# Altium PCB BLErelay.PcbDoc
Units mm, origin at the board's own origin, x right, y up, seen from the top; angles counter-clockwise.
Board outline 21 x 43.51 mm, 2 copper layers (Top Layer, Bottom Layer), stack 1.569 mm thick; 48 components, 59 nets, 167 pads, 64 vias.
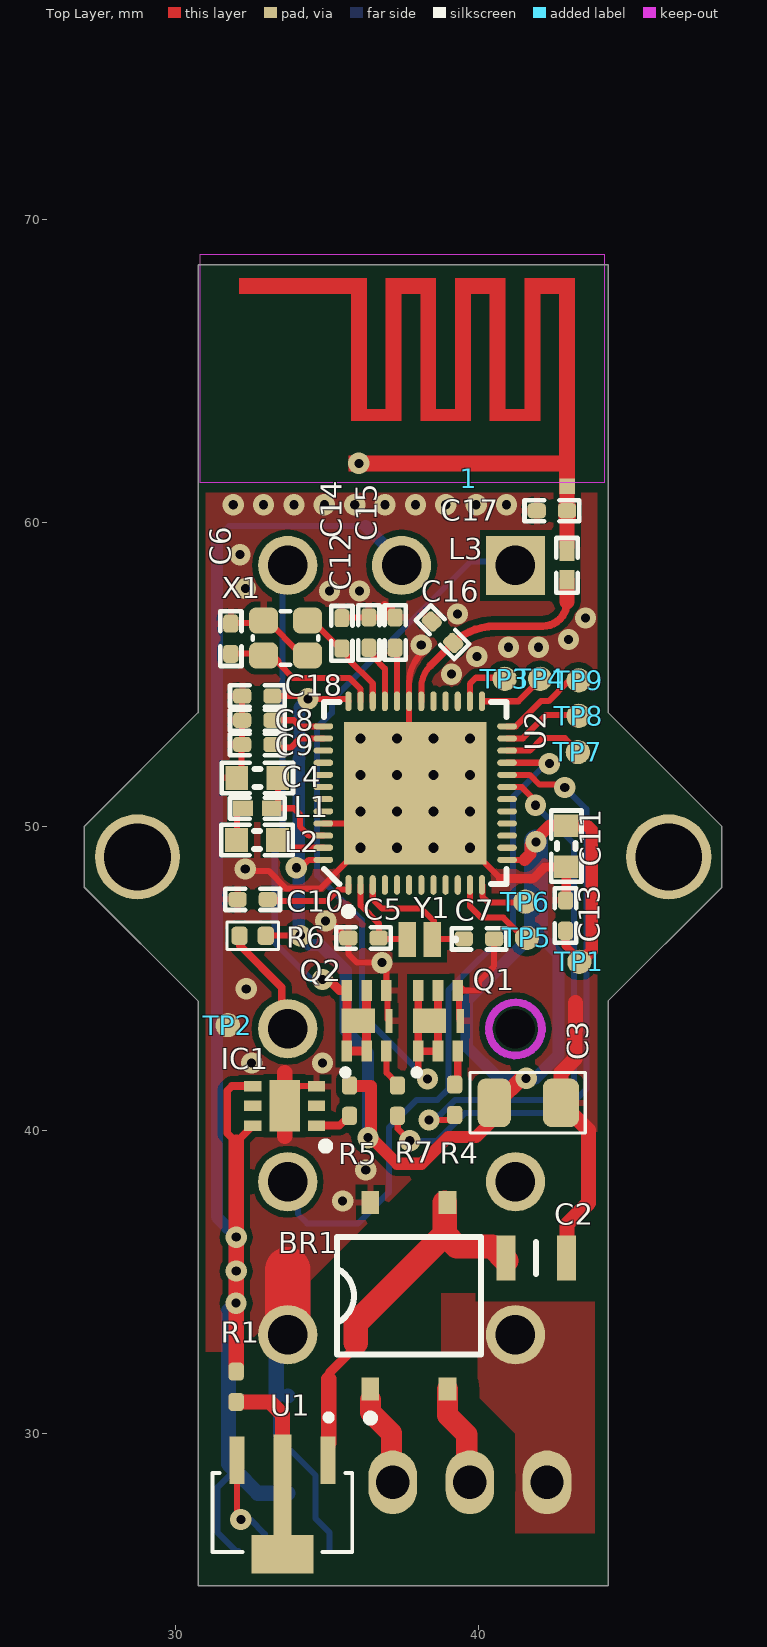
[diagram p0: Top Layer view]
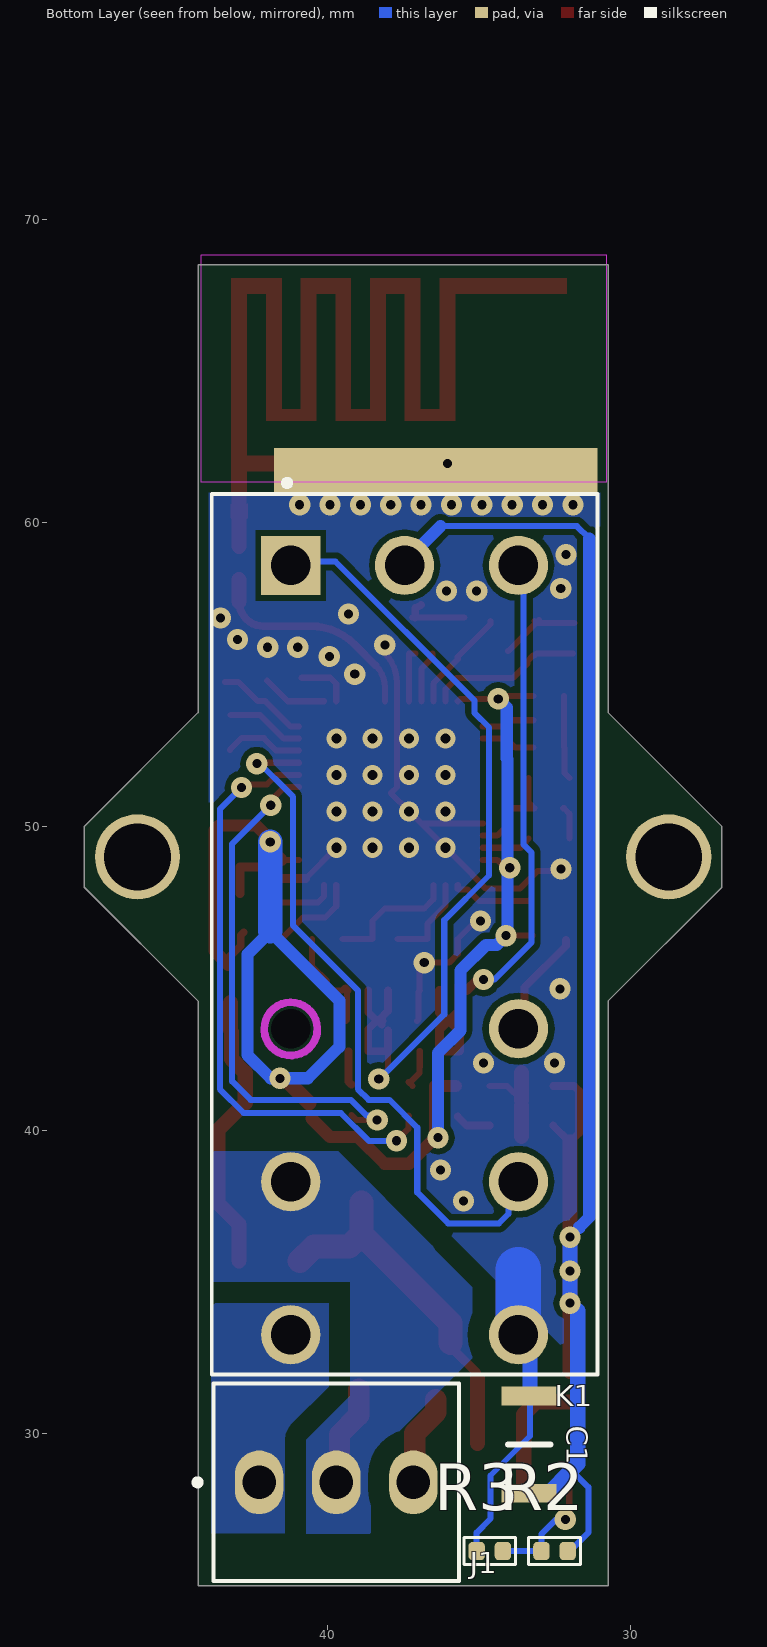
[diagram p1: Bottom Layer view, seen from below]
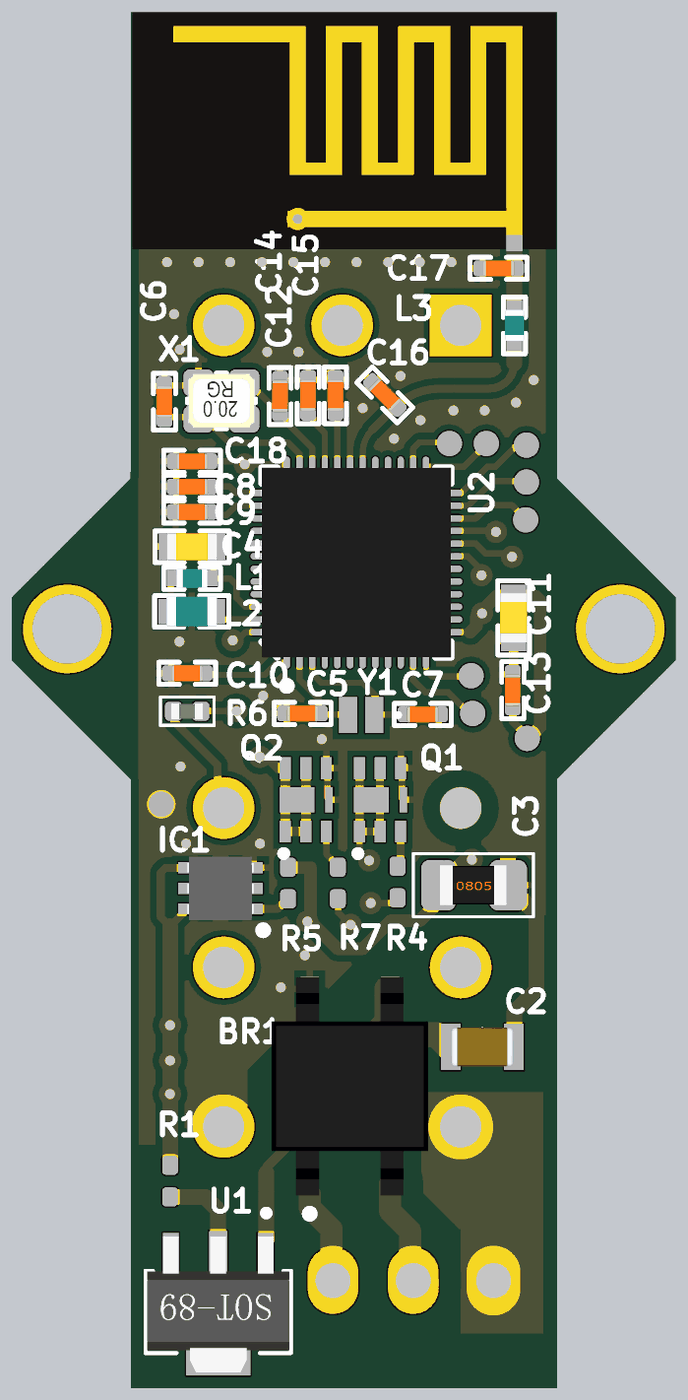
[diagram p2: 3D render of the assembled board from above, using the file's embedded part models]
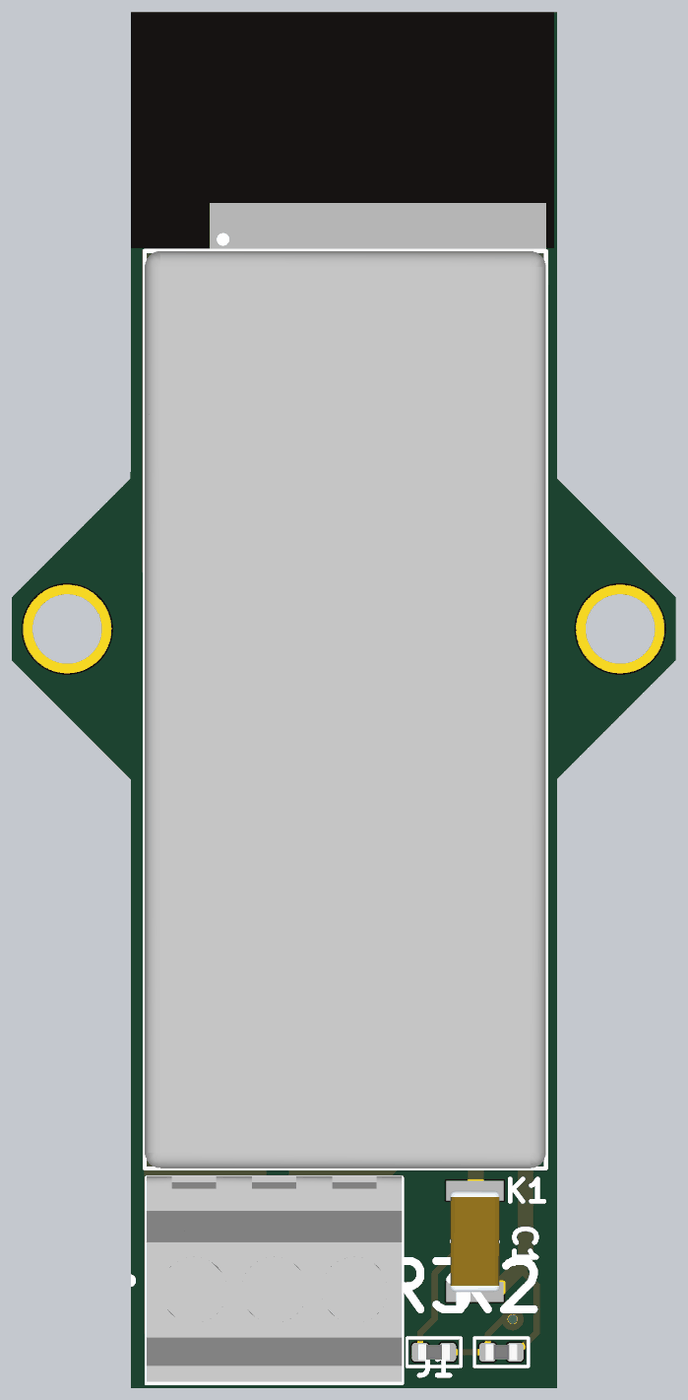
[diagram p3: 3D render of the assembled board from below, using the file's embedded part models]

## Layer stack, top to bottom
Top Solder: solder mask 0.0254, SM-001, Dk 4
Top Layer: signal copper 0.035
Dielectric 1: core 1.4986, Core-043, Dk 4.3
Bottom Layer: signal copper 0.035
Bottom Solder: solder mask 0.0254, SM-001, Dk 4

## Board outline
27,48 27,50 30.75,53.75 30.75,68.5 44.25,68.5 44.25,53.75 48,50 48,48 44.25,44.25 44.25,24.995 30.75,24.995 30.75,44.25

## Design rules (kind name [scope] priority, off if disabled: settings)
BoardOutlineClearance [All] p1: gap=0.254 ignorepadtopadclearanceinfootprint=FALSE
Clearance Clearance_power [InNetClass('High voltage')] p1: gap=0.7 ignorepadtopadclearanceinfootprint=FALSE
Clearance Clearance_not_via [not IsVia and (not InComponent('U2')) vs not IsVia] p2: gap=0.2 ignorepadtopadclearanceinfootprint=TRUE except(0.202: Arc-Fill Arc-Poly Arc-Region Track-Fill Track-Poly Track-Region SMDPad-Fill SMDPad-Poly SMDPad-Region THPad-Fill THPad-Poly THPad-Region Via-Fill Via-Poly Via-Region)
Clearance Clearance_via [IsVia] p3: gap=0.202 ignorepadtopadclearanceinfootprint=FALSE
Clearance Clearance_same_net [(not InComponent('1')) and (not InComponent('U2'))] p4: gap=0.202 ignorepadtopadclearanceinfootprint=TRUE
Clearance Clearance_pad_pad [IsPad and (not InComponent('U2')) vs IsPad] p5: gap=0.2 ignorepadtopadclearanceinfootprint=FALSE
ComponentClearance [All] p1: gap=0.1 collisioncheckmode=3 verticalgap=0.254 showdistances=FALSE
DiffPairsRouting [All] p1: maxlimit=0.254 minlimit=0.102 mostfreqgap=0.203 toplayer_minwidth=0.102 toplayer_maxwidth=2.54 toplayer_prefwidth=0.152 bottomlayer_minwidth=0.102 bottomlayer_maxwidth=2.54 bottomlayer_prefwidth=0.152 maxuncoupledlength=12.7
HoleSize [All] p1: absolutevalues=TRUE maxlimit=5.08 minlimit=0.3 maxpercent=80.000 minpercent=20.000
Length [All] p1: maxlimit=700 minlimit=0
MinimumSolderMaskSliver [All] p1: minsoldermaskwidth=0.151
PlaneClearance [All] p1: clearance=0.2
PlaneConnect [All] p1: planeconnectstyle=Relief reliefexpansion=0.2 reliefentries=4 reliefconductorwidth=0.2 reliefairgap=0.2
PolygonConnect PolygonConnect_vias [All vs IsVia] p1: connectstyle=Direct reliefconductorwidth=0.2 reliefentries=4 polygonreliefangle="90 Angle" airgapwidth=0.2
PolygonConnect [All] p2: connectstyle=Relief reliefconductorwidth=0.2 reliefentries=4 polygonreliefangle="90 Angle" airgapwidth=0.2
RoomDefinition Zynq [InComponentClass('Zynq')] p1: confinementstyle=ConfineIn formatcopy=TRUE lockcomponents=FALSE outline 0,0 50.8,0 50.8,25.4 0,25.4
RoomDefinition "Wireless charger" [InComponentClass('Wireless charger')] p2: confinementstyle=ConfineIn formatcopy=TRUE lockcomponents=FALSE outline 0,0 50.8,0 50.8,25.4 0,25.4
RoomDefinition WiFI [InComponentClass('WiFI')] p3: confinementstyle=ConfineIn formatcopy=TRUE lockcomponents=FALSE outline 0,0 50.8,0 50.8,25.4 0,25.4
RoomDefinition USB [InComponentClass('USB')] p4: confinementstyle=ConfineIn formatcopy=TRUE lockcomponents=FALSE outline 0,0 50.8,0 50.8,25.4 0,25.4
RoomDefinition "QSPI flash" [InComponentClass('QSPI flash')] p5: confinementstyle=ConfineIn formatcopy=TRUE lockcomponents=FALSE outline 0,0 50.8,0 50.8,25.4 0,25.4
RoomDefinition Power [InComponentClass('Power')] p6: confinementstyle=ConfineIn formatcopy=TRUE lockcomponents=FALSE outline 0,0 50.8,0 50.8,25.4 0,25.4
RoomDefinition eMMC [InComponentClass('eMMC')] p7: confinementstyle=ConfineIn formatcopy=TRUE lockcomponents=FALSE outline 0,0 50.8,0 50.8,25.4 0,25.4
RoomDefinition DDR3 [InComponentClass('DDR3')] p8: confinementstyle=ConfineIn formatcopy=TRUE lockcomponents=FALSE outline 0,0 50.8,0 50.8,25.4 0,25.4
RoomDefinition Connectors [InComponentClass('Connectors')] p9: confinementstyle=ConfineIn formatcopy=TRUE lockcomponents=FALSE outline 0,0 50.8,0 50.8,25.4 0,25.4
RoomDefinition Charge [InComponentClass('Charge')] p10: confinementstyle=ConfineIn formatcopy=TRUE lockcomponents=FALSE outline 0,0 50.8,0 50.8,25.4 0,25.4
RoomDefinition Audio [InComponentClass('Audio')] p11: confinementstyle=ConfineIn formatcopy=TRUE lockcomponents=FALSE outline 0,0 50.8,0 50.8,25.4 0,25.4
RoutingVias [All] p1: holewidth=0.2 width=0.4 viastyle="Through Hole" minholewidth=0.2 minwidth=0.4 maxholewidth=6.3 maxwidth=10
ShortCircuit [(not InComponent('1'))] p1: allowed=FALSE
SilkToSolderMaskClearance [IsPad] p1: minsilkscreentomaskgap=0.051 clearancetoexposedcopper=TRUE
SolderMaskExpansion [All] p1: expansion=0.051
Width [All] p1: maxlimit=2 minlimit=0.2 preferedwidth=0.2
Width Width_power [InNetClass('Power')] p2: maxlimit=2 minlimit=0.2 preferedwidth=0.2
22 further rules are at their usual default settings.

## Classes and differential pairs
net class "High voltage": IN1_AC IN2_AC OUT_AC VDD_MAINS

## Components (designator, comment, footprint, x,y, rotation, side; value= is the part's Value field where it differs from the comment)
1 "Antenna" "ANTENNA 2.4GHZ_MIFA_FR4" 43.154,60.946 r0 top
BR1 "RMB4S" Vishay_MB2S-E3-45_0 37.694,34.544 r90 top
C1 "C3216X5R1V226M160AC" CAPC3216X180N 33.35,29.642 r270 bottom
C2 "C2012X7T2W473K125AA" CAPC2012X145N 41.885,35.789 r180 top
C3 "47uF" Res_0805 40.5,40.9 r0 top
C4 "1.0µF" CAPC1608X06L 32.7,51.6 r0 top
C5 "7pF" CAPC1005X04L 36.195,46.33 r0 top
C6 "12pF" CAPC1005X04L 31.826,56.185 r90 top
C7 "7pF" CAPC1005X04L 40,46.3 r180 top
C8 "12pF" CAPC1005X04L 32.7,53.5 r180 top
C9 "12pF" CAPC1005X04L 32.7,52.7 r180 top
C10 "100nF" CAPC1005X04L 32.546,47.6 r180 top
C11 "4.7µF" CAPC1608X06L 42.875,49.352 r270 top
C12 "12pF" CAPC1005X04L 35.484,56.363 r90 top
C13 "100nF" CAPC1005X04L 42.85,47.066 r90 top
C14 "100pF" CAPC1005X04L 36.373,56.388 r90 top
C15 "N.C." CAPC1005X04L 37.236,56.388 r90 top
C16 "0.8pF" CAPC1005X04L 38.8,56.4 r315 top
C17 "N.C." CAPC1005X04L 42.4,60.4 r180 top
C18 "100nF" CAPC1005X04L 32.7,54.3 r180 top
IC1 "TPS70933DRVR" SON65P200X200X80-7N 33.6,40.8 r180 top
J1 "282834-3" *TE_282834-3 42.24,28.4 r180 bottom
K1 "5-1393243-4" *TE_5-1393243-4_RT424F12(PRIMARY) 37.45,46.45 r270 bottom locked
L1 "15nH" INDC1005X04L 32.7,50.6 r180 top
L2 "10µH" INDC1608X06L 32.69,49.555 r0 top
L3 "3.9nH" INDC1005X04L 42.9,58.6 r90 top
Q1 "IRLHS6242TRPBF" *QFN65P200X200X100-8N 38.65,43.6 r90 top
Q2 "IRLHS6242TRPBF" *QFN65P200X200X100-8N 36.3,43.6 r90 top
R1 "0R" 0402#1 32.004,31.547 r90 top
R2 "2.4K" 0402#2 32.512,26.137 r180 bottom
R3 "33K" 0402#2 34.646,26.137 r180 bottom
R4 "3.6K" 0402#1 39.2,41 r90 top
R5 "0R" 0402#1 35.738,40.97 r270 top
R6 "3.6K" 0402#2 32.546,46.4 r0 top
R7 "3.6K" 0402#1 37.313,40.97 r90 top
TP1 "Test point" Testpoint_Keystone_Miniature 43.307,45.542 r90 top
TP2 "Test point" Testpoint_Keystone_Miniature 31.725,43.459 r90 top
TP3 "Test point" Testpoint_Keystone_Miniature 40.843,54.864 r90 top
TP4 "Test point" Testpoint_Keystone_Miniature 42.012,54.864 r90 top
TP5 "Test point" Testpoint_Keystone_Miniature 41.58,46.33 r90 top
TP6 "Test point" Testpoint_Keystone_Miniature 41.529,47.523 r90 top
TP7 "Test point" Testpoint_Keystone_Miniature 43.256,52.451 r90 top
TP8 "Test point" Testpoint_Keystone_Miniature 43.282,53.645 r90 top
TP9 "Test point" Testpoint_Keystone_Miniature 43.282,54.813 r90 top
U1 "LR8N8" "SOT89 (TO253AA)" 33.528,27.686 r270 top
U2 "nRF52832-QFAAB0" QFN40P600X600X90-48N 37.9,51.1 r90 top
X1 "32MHz" BT-XTAL_2016 33.63,56.21 r180 top
Y1 "ECS-.327-7-1210-TR" *XTAL_ECS-.327-7-1210-TR 38.049,46.279 r180 top

## Footprints (in the part's own frame and the unit in brackets; to place one, negate y for a bottom-side part, rotate by r counter-clockwise, add the part's x,y. Pads: shape width x height; smd on the part's side, far side on the other; paste and mask are expansions set on the pad)
0402#1 [mm] "Chip Capacitor, Body 1.0x0.5mm, IPC High Density"
  rrect50% 0.6x0.5 smd: 1(-0.5,0) 2(0.5,0)
  body extent -0.55,-0.3 0.55,0.3, height 1.3
0402#2 [mm]
  rrect50% 0.54x0.6 smd mask+0.05: 1(-0.432,0) 2(0.432,0)
  silkscreen extent -0.85,-0.45 0.85,0.45, body extent -0.5,-0.25 0.5,0.25, height 0.25
*QFN65P200X200X100-8N [mm]
  rect 0.69x0.35 smd: 1(-1,0.65) 2(-1,0) 3(-1,-0.65) 4(1,-0.65) 5(1,0) 6(1,0.65)
  rect 0.8x1.1 smd: 7(0,0.28)
  rect 0.795x0.24 smd: 8(0,-0.735)
  silkscreen extent -1.84,0.56 -1.56,0.84, body extent -1.27,-1.02 1.27,1.02, height 0.5
*TE_5-1393243-4_RT424F12(PRIMARY) [mm]
  round 1.95 hole 1.3: 11(8.15,-3.75) 14(13.19,-3.75) 21(8.15,3.75) 22(3.11,3.75) 24(13.19,3.75) A2(-12.15,3.75) A3(-12.15,0)
  round 0 hole 1.3: 12(3.11,-3.75)
  rect 1.95x1.95 hole 1.3: A1(-12.15,-3.75)
  silkscreen extent -14.96,-6.35 14.5,6.35, body extent -14.5,-6.35 14.5,6.35, height 15.7
*TE_282834-3 [mm]
  oval 1.6x2.1 hole 1.1: 1(0,0) 2(2.54,0) 3(5.08,0)
  silkscreen extent -2.13,-3.25 6.58,3.25, body extent -1.5,-3.2 6.58,3.3, height 10.05
*XTAL_ECS-.327-7-1210-TR [mm]
  rect 0.57x1.14 smd: 1(-0.413,0) 2(0.413,0)
  silkscreen extent -1.22,-0.05 -1.12,0.05
"ANTENNA 2.4GHZ_MIFA_FR4" [mil]
  rect 20x20 smd: 1(-10,10)
  rect 419.56x60 smd far side: 2(-265,30)
  Top Layer region: 0,0 0,280 -65,280 -65,110 -90,110 -90,280 -155,280 -155,110 -180,110 -180,280 -245,280 -245,110 -270,110 -270,280 -435,280 -435,260 -290,260 -290,95 -225,95 -225,260 -200,260 -200,95 -135,95 -135,260 -110,260 -110,95 -45,95 -45,260 -20,260 -20,0
  Top Layer region: 0,50 -293,50 -293,30 0,30
  Bottom Layer region: 0,560
  Bottom Layer region: 0,0
BT-XTAL_2016 [mm]
  rrect50% 0.95x0.85 smd: 1(-0.725,-0.575) 2(0.725,-0.575) 3(0.725,0.575) 4(-0.725,0.575)
  silkscreen extent -1.08,-0.88 1.08,0.88, body extent -1.05,-0.85 1.05,0.85, height 0.56
CAPC1005X04L [mm]
  rrect50% 0.6x0.5 smd: 1(-0.5,0) 2(0.5,0)
  silkscreen extent -0.9,-0.35 0.9,0.35, body extent -0.51,-0.25 0.51,0.25, height 0.5
CAPC1608X06L [mm]
  rect 0.75x0.8 smd: 1(-0.675,0) 2(0.675,0)
  silkscreen extent -1.17,-0.5 1.18,0.5, body extent -0.8,-0.43 0.8,0.43, height 0.8
CAPC2012X145N [mm]
  rect 0.62x1.47 smd: 1(-1,0) 2(1,0)
  silkscreen extent 0,-0.53 0,0.53, body extent -1,-0.63 1,0.63, height 1.45
CAPC3216X180N [mm]
  rect 0.62x1.82 smd: 1(-1.6,0) 2(1.6,0)
  silkscreen extent 0,-0.7 0,0.7, body extent -1.6,-0.8 1.6,0.8, height 1.8
INDC1005X04L [mm]
  rect 0.65x0.5 smd: 1(-0.475,0) 2(0.475,0)
  silkscreen extent -0.9,-0.35 0.9,0.35, body extent -0.5,-0.3 0.5,0.3, height 0.5
INDC1608X06L [mm]
  rect 0.75x0.8 smd: 1(-0.675,0) 2(0.675,0)
  silkscreen extent -1.17,-0.5 1.18,0.5, body extent -0.8,-0.48 0.8,0.48, height 0.8
QFN40P600X600X90-48N [mm]
  oval 0.65x0.2 smd mask+0.05: 1(-3.025,2.2) 2(-3.025,1.8) 3(-3.025,1.4) 4(-3.025,1) 5(-3.025,0.6) 6(-3.025,0.2) 7(-3.025,-0.2) 8(-3.025,-0.6) 9(-3.025,-1) 10(-3.025,-1.4) 11(-3.025,-1.8) 12(-3.025,-2.2) 25(3.025,-2.2) 26(3.025,-1.8) 27(3.025,-1.4) 28(3.025,-1) 29(3.025,-0.6) 30(3.025,-0.2) 31(3.025,0.2) 32(3.025,0.6) 33(3.025,1) 34(3.025,1.4) 35(3.025,1.8) 36(3.025,2.2)
  oval 0.2x0.65 smd mask+0.05: 13(-2.2,-3.025) 14(-1.8,-3.025) 15(-1.4,-3.025) 16(-1,-3.025) 17(-0.6,-3.025) 18(-0.2,-3.025) 19(0.2,-3.025) 20(0.6,-3.025) 21(1,-3.025) 22(1.4,-3.025) 23(1.8,-3.025) 24(2.2,-3.025) 37(2.2,3.025) 38(1.8,3.025) 39(1.4,3.025) 40(1,3.025) 41(0.6,3.025) 42(0.2,3.025) 43(-0.2,3.025) 44(-0.6,3.025) 45(-1,3.025) 46(-1.4,3.025) 47(-1.8,3.025) 48(-2.2,3.025)
  rect 4.7x4.7 smd: 49(0,0)
  silkscreen extent -4.02,-3 3,3, body extent -3.02,-3.02 3.02,3.02, height 0.86
Res_0805 [mm]
  rrect50% 1.1x1.6 smd: 1(0,0)
  rrect50% 1.2x1.6 smd: 2(2.2,0)
  silkscreen extent -0.8,-1 3,1, body extent 0.05,-0.65 2.15,0.65, height 0.5
SON65P200X200X80-7N [mm]
  rect 0.57x0.35 smd: 1(-1.05,0.65) 2(-1.05,0) 3(-1.05,-0.65) 4(1.05,-0.65) 5(1.05,0) 6(1.05,0.65)
  rect 1x1.7 smd: 7(0,0)
  silkscreen extent -1.48,1.2 -1.23,1.45, body extent -1.05,-1 1.05,1, height 0.8
"SOT89 (TO253AA)" [mm]
  rect 1.57x0.5 smd: 1(-1.44,1.5) 3(-1.44,-1.5)
  rect 3.81x0.58 smd: 2(-0.381,0)
  rect 1.27x2.032 smd: 2(1.651,0)
  silkscreen extent -2.95,-2.3 1.58,2.3, body extent -2.11,-2.25 2.19,2.25, height 1.51
Testpoint_Keystone_Miniature [mm] "Miniature SMT test point"
  round 0.8 smd: 1(0,0)
Vishay_MB2S-E3-45_0 [mm]
  rect 0.76x0.58 smd paste+0 mask+0: 1(-3.075,1.27) 2(-3.075,-1.27) 3(3.075,-1.27) 4(3.075,1.27)
  silkscreen extent -4.15,-2.37 1.94,2.37, body extent -3.45,-2.47 3.45,2.48, height 2.93

## Part data
BR1: Package="SMD-4 SMC Diode", Availability=Unavailable, MF="SMC Diode", MP=DB107S, Price=None, SnapEDA_Link=https://www.snapeda.com/parts/DB107S/SMC%20Diode%20Solutions/view-part/?ref=snap
C1: "Capacitor", Manufacturer_Name=TDK, Mouser Part Number=810-C3216X5R1V226M, RS Part Number=7883063P, Datasheet Link=https://product.tdk.com/info/en/catalog/datasheets/mlcc_commercial_midvoltage_en.pdf, Height=1.8mm, Manufacturer_Part_Number=C3216X5R1V226M160AC, Mouser Price/Stock=https://www.mouser.com/Search/Refine.aspx?Keyword=810-C3216X5R1V226M, RS Price/Stock=http://uk.rs-online.com/web/p/products/7883063P
C2: "Capacitor", Manufacturer_Name=TDK, Mouser Part Number=810-C2012X7T2W473KAA, Datasheet Link=https://product.tdk.com/info/en/catalog/datasheets/mlcc_commercial_midvoltage_en.pdf, Height=1.45mm, Manufacturer_Part_Number=C2012X7T2W473K125AA, Mouser Price/Stock=https://www.mouser.com/Search/Refine.aspx?Keyword=810-C2012X7T2W473KAA
C3: library part "Capacitor 47uF", ComponentLink1Description="Datasheet link", ComponentLink1URL=http://www.yageo.com/documents/recent/UPY-GP_NP0_16V-to-50V_16.pdf
C4: library part C0603-1µ0, "Capacitor, X7R, ±10%", Part number IPS=00000000616, Artikkelnr Noca=20039335, Artikkelnr Simpro=N.A., Footprint Doc=0603, LatestRevisionDate=2013-06-05, Note=16V, Part Number=C0603-1µ0, Pin Count=2, Published=2009-05-08, Publisher="Nordic Semiconductor"
C5 C6 C7 C8 C9 C12: library part C0402-12p, "Capacitor, NP0, ±2%", Part number IPS=00000002398, Artikkelnr Noca=20029159, Artikkelnr Simpro=N.A., Footprint Doc=0402, LatestRevisionDate=2011-05-11, Note=50V, Part Number=C0402-12p, Pin Count=2, Published=2009-05-08, Publisher="Nordic Semiconductor"
C10 C13 C18: library part C0402-100n, "Capacitor, X7R, ±10%", Part number IPS=00000005296, Artikkelnr Noca=20039200, Artikkelnr Simpro=N.A., Footprint Doc=0402, LatestRevisionDate=2009-11-23, Note=16V, Part Number=C0402-100n, Pin Count=2, Published=2009-05-08, Publisher="Nordic Semiconductor"
C11: library part C0603-4µ7, "Capacitor, X5R, ±10%", Part number IPS=00000003141, Artikkelnr Noca=20069060, Artikkelnr Simpro=N.A., Footprint Doc=0603, LatestRevisionDate=2009-11-23, Note=6.3V, Part Number=C0603-4µ7, Pin Count=2, Published=2009-05-08, Publisher="Nordic Semiconductor"
C14: library part C0402-100p, "Capacitor, NP0, ±5%", Part number IPS=00000002361, Artikkelnr Noca=20029135, Artikkelnr Simpro=N.A., Footprint Doc=0402, LatestRevisionDate=2009-05-08, Note=50V, Part Number=C0402-100p, Pin Count=2, Published=2009-05-08, Publisher="Nordic Semiconductor"
C15 C17: library part C0402-N.C., "Not mounted", Artikkelnr Noca=N.A., Artikkelnr Simpro=N.A., Assembly="Not mounted", Footprint Doc=0402, LatestRevisionDate=2009-05-08, Note="Chip Cap", Part Number=C0402-N.C., Pin Count=2, Published=2009-05-08, Publisher="Nordic Semiconductor"
C16: library part C0402-0.8p, "Capacitor, NP0, ±5%", Artikkelnr Noca=20029147, Artikkelnr Simpro=N.A., Footprint Doc=0402, LatestRevisionDate=2012-11-21, Note=50V, Part Number=C0402-0.8p, Pin Count=2, Published=2009-05-08, Publisher="Nordic Semiconductor"
IC1: "Integrated Circuit", Manufacturer_Name="Texas Instruments", Mouser Part Number=595-TPS70933DRVR, Datasheet Link=http://www.ti.com/lit/gpn/tps709, Height=0.8mm, Manufacturer_Part_Number=TPS70933DRVR, Mouser Price/Stock=https://www.mouser.com/Search/Refine.aspx?Keyword=595-TPS70933DRVR
J1: "3 Position Wire to Board Terminal Block Horizontal with Board 0.100 _2.54mm_", Package=None, Availability=Unavailable, EU_RoHS_Compliance="Compliant with Exemptions", MF="TE Connectivity", MP=282834-3, Price=None, SnapEDA_Link=https://www.snapeda.com/parts/282834-3/TE%20Connectivity%20AMP%20Connectors/view-part/?ref=snap, TE_purchase_URL=https://www.te.com/usa-en/product-282834-3.html?te_bu=Cor&te_type=disp&te_campaign=seda_glo_cor-seda-global-disp-prtnr-fy19-seda-model-bom-cta_sma-317_1&elqCampaignId=32493
K1: library part RT424F12, "Electromechanical Relay 12VDC 240Ohm 15A DPDT __ 29mm 12.7mm 15.7mm__ THT Power Relay", Package=None, Availability=Unavailable, MF="TE Connectivity", MP=RT424F12, Price=None, SnapEDA_Link=https://www.snapeda.com/parts/RT424F12/TE%20Connectivity%20Potter%20%26%20Brumfield%20Relays/view-part/?ref=snap, TE_purchase_URL=https://www.te.com/usa-en/product-5-1393243-4.html?te_bu=Cor&te_type=disp&te_campaign=seda_glo_cor-seda-global-disp-prtnr-fy19-seda-model-bom-cta_sma-317_1&elqCampaignId=32493
L1: library part L0402-15n, "Inductor, 320mA, ±5%", 2nd source part number=658-1328, Manufacturer="Taiyo Yuden", Manufacturer Part Number=HK100515NJ-T, Supplier part number=587-1521-1-ND, 2nd source Supplier=Farnell, Artikkelnr Noca=33029323, Artikkelnr Simpro=N.A., ComponentLink1Description=Datasheet, ComponentLink2Description="Supplier link", Datasheet=http://www.yuden.co.jp/productdata/catalog/en/mlci04_e.pdf, Footprint Doc=0402, LatestRevisionDate=2012-09-19, Note="High frequency chip inductor ±10%", Part Number=L0402-15n, Pin Count=2, Published=2010-07-12, Publisher="Nordic Semiconductor", Supplier=Digi-Key
L2: library part L0603-10µ, "Inductor, 80mA, ±10%", 2nd source part number=178-6105, Manufacturer="Taiyo Yuden", Manufacturer Part Number=LBMF1608T100K, Supplier part number=587-1714-1-ND, 2nd source Supplier=Farnell, Artikkelnr Noca=33029314, Artikkelnr Simpro=N.A., ComponentLink1Description=Datasheet, ComponentLink2Description="Supplier link", Datasheet=http://www.yuden.co.jp/ut/product/pdf/elb2_e.pdf, Footprint Doc=0603, LatestRevisionDate=2012-09-19, Note="LBMF1608T100K 10µH 80mA 0603", Part Number=L0603-10µ, Pin Count=2, Published=2010-02-24, Publisher="Nordic Semiconductor", Supplier=Digi-Key
L3: library part L0402-3n9, "Inductor, 170mA, ±0.1nH", Manufacturer=Murata, Manufacturer Part Number=LQP15MN3N9B02D, Supplier part number=490-1131-1-ND, Artikkelnr Noca=33029151, Artikkelnr Simpro=N.A., ComponentLink1Description=Datasheet, ComponentLink2Description="Supplier link", Datasheet=http://search.murata.co.jp/Ceramy/image/img/PDF/ENG/L0075S0084LQP15M.pdf, Footprint Doc=0402, LatestRevisionDate=2012-09-19, Note="High frequency chip inductor ±5%", Part Number=L0402-3n9, Pin Count=2, Published=2009-05-08, Publisher="Nordic Semiconductor", Supplier=Digi-Key
Q1 Q2: "Single N-Channel 20 V 11.7 mO 14 nC SMT HexFet Power Mosfet - PQFN 2 x 2 mm", Package="PQFN-6 Infineon", Availability=Unavailable, MF=Infineon, MP=IRLHS6242TRPBF, Price=None, SnapEDA_Link=https://www.snapeda.com/parts/IRLHS6242TRPBF/Infineon%20Technologies/view-part/?ref=snap
R1: library part "Resistor 0R"
R2: library part "Resistor 2.4K"
R3: library part "Resistor 33K"
R4 R5 R6 R7: library part "Resistor 3.6K"
TP1 TP2 TP3 TP4 TP5 TP6 TP7 TP8 TP9: "Test Point, Miniature, SMT", ComponentLink1Description="Datasheet URL", ComponentLink1URL=http://www.keyelco.com/userAssets/store/files/5015.PDF
U1: "Linear Regulator, Ultra-Wide Input Voltage Range"
U2: "Multi-protocol Bluetooth Low Energy, ANT and 2.4GHz proprietary system-on-chip", Manufacturer="Nordic Semiconductor", Artikkelnr Noca=15079334, Artikkelnr Simpro=N.A., Footprint Doc=QFN-48, LatestRevisionDate=2016-08-25, Manufacturer Part Number=nRF52832-QFAAB0, Part Number=nRF52832-QFAAB0, Pin Count=48, Published=2016-08-25, Publisher="Nordic Semiconductor", Supplier="Nordic Semiconductor", Supplier part number=nRF52832-QFAAB0
X1: library part XTAL_SMD2016_32MHz_8pF_Epson, "XTAL SMD 2016, 32MHz, Cl=8pF, Tol: ±10ppm, Stab: ±10ppm", Manufacturer="Epson Toyocom", Manufacturer Part Number=Q22FA12800025, Supplier part number=171-2806, Artikkelnr Noca=22019238, Artikkelnr Simpro=N.A., Datasheet=http://www.epsondevice.com/docs/qd/en/DownloadServlet?id=ID000449, Footprint Doc=XTAL_2016, LatestRevisionDate=2014-11-27, Note="XTAL SMD 32.000MHz", Part Number=XTAL_SMD2016_32MHz_8pF_Epson, Pin Count=4, Published=2012-03-09, Publisher="Nordic Semiconductor", Supplier=Farnell
Y1: "CRYSTAL 32.768KHZ 7PFSMD ECX-1210 KHZ Crystal 32.768khz 20ppm 90k OHM -40C ~ 85C 2-SMD", Package="SMD-2 ECS International", Availability=Unavailable, MF="ECS Inc.", MP=ECS-.327-7-1210-TR, Price=None, SnapEDA_Link=https://www.snapeda.com/parts/ECS-.327-7-1210-TR/ECS%20Inc./view-part/?ref=snap

## Free pads (board coordinates)
  round 2.8 hole 2.2: 2(28.75,49) 2(46.25,49)

## Via types
v1: diameter 0.7, hole 0.3, Top Layer to Bottom Layer, tented both sides, 47 vias
v2: diameter 0.66, hole 0.33, Top Layer to Bottom Layer, 16 vias
v3: diameter 0.7, hole 0.3, Top Layer to Bottom Layer, 1 vias

## Nets (pads, with @x,y where several pads share a name; then routed paths per layer and width w, separated by ;. In a path a pad name is that pad's centre, name@x,y a point inside that pad or via, vN(x,y) a via of type N, cw(c..) or ccw(c..) an arc to the next point about the centre after c; other vN are vias at no path point)
DEC1: C10.1 U2.1 | length 2.7
  Top Layer w0.2: C10.1@33.3,47.6 33.351,47.549 35.001,47.549 35.377,47.925 35.677,47.925 35.7,47.948 U2.1
DEC2: C15.1 U2.32 | length 1.8
  Top Layer w0.2: C15.1@37.086,55.7 37.3,55.7 U2.32
DEC3: C14.1 U2.33 | length 1.7
  Top Layer w0.2: C14.1@36.529,55.699 36.529,55.572 36.9,55.2 U2.33
DEC4: C4.2 L1.1 U2.46 | length 3.4
  Top Layer w0.2: L1.1@33.337,50.763 L1.1@33.35,50.75 ; C4.2 33.375,50.775 L1.1@33.35,50.75 ; U2.46 34.4,49.7 34.1,50 34.1,50.4 33.9,50.6 L1.1 33.275,50.7 33.3,50.7 L1.1@33.35,50.75
FB: K1.21 U2.21 | length 22.7
  Top Layer w0.2: U2.21 42.286,52.1 v1(42.316,52.07)
  Bottom Layer w0.2: K1.21@33.96,37.922 34.035,37.847 34.035,37.238 34.341,36.932 36.017,36.932 37.033,37.948 37.033,40.081 37.948,40.996 38.633,40.996 38.989,41.351 38.989,44.602 41.123,46.736 41.123,50.978 42.367,52.222 42.367,52.121 v1(42.316,52.07)
GND: 1.2 BR1.4 C1.1 C2.1 C3.2 C4.1 C5.1 C6.2 C7.1 C8.2 C9.2 C10.2 C11.2 C12.2 C13.2 C14.2 C15.2 C16.1 C17.2 C18.2 IC1.3 IC1.7 K1.24 Q1.4 Q1.8 Q2.4 Q2.8 R3.1 TP2.1 U2.31 U2.45 U2.49 X1.2 X1.4 | length 60.3
  Top Layer w0.2: C6.2@31.852,56.7 33.1,56.7 X1.2@33.107,56.707 ; C4.1 32.182,51.757 32.182,52.582 32.2,52.6 C9.2 C8.2 C18.2 ; v1@32.385,48.539 33.071,48.539 33.655,47.955 34.773,47.955 35.212,48.395 35.212,48.412 v2(36.1,49.3) U2.49@36.9,50.1 ; X1.2@33.02,56.794 X1.2@33.107,56.707 ; X1.2@33.175,56.775 X1.2@33.107,56.707 ; IC1.7 33.6,40.975 34.075,41.45 IC1.3 ; X1.4@34.036,55.778 X1.2@33.107,56.707 ; U2.45 U2.49@36.9,50.1 ; v1(34.95,46.888) 35.103,46.888 35.691,46.3 35.7,46.3 35.7,45.8 35.983,45.517 v1(36.805,45.517) 36.805,45.441 36.957,45.288 36.957,44.607 Q2.4 36.993,44.558 36.993,43.642 Q2.8 ; C12.2@35.484,56.878 37.1,56.878 C15.2@37.211,56.878 ; v1@38.1,55.7 ccw(c39.066,54.734) 37.7,54.734 U2.31 37.7,51.3 U2.49 v2(37.3,50.5) U2.49@36.9,50.1 ; Q1.8 39.342,43.643 39.342,44.558 Q1.4 39.4,44.7 39.5,44.6 40,44.6 40,44.9 40.5,45.4 C7.1 ; v2(39.7,49.3) 40.715,48.285
  Top Layer w0.254: K1.24@33.528,33.088 K1.24 ; 36.9,57.3 37.1,57.2 C15.2@37.1,56.878
  Top Layer w0.3: 40.715,48.285 41.783,48.285 42.164,48.666 42.875,48.666 C13.2@42.875,47.795
  Top Layer w0.5: 33.6,39.8 IC1.7 ; IC1.7@33.6,40.975 33.6,41.9 ; C2.1@42.9,35.7 42.9,36.9 43.603,37.603 43.603,39.997 C3.2 42.7,41.887 43.155,42.342 43.155,43.231 ; 43.18,43.307 43.18,44.196
  Top Layer w1.5: K1.24 33.7,35.4
  Bottom Layer w0.2: 33.321,31.621 33.321,29.925 34.62,28.626 34.62,27.203 35.078,26.746 R3.1
  Bottom Layer w0.5: 33.321,31.621 33.325,31.617 ; C1.1 33.325,31.267 33.325,31.617 ; K1.24 33.325,32.885 33.325,31.617
  Bottom Layer w1.5: K1.24 33.7,35.4
  other v1: 35.509,37.668 36.271,38.684 32.512,42.215 34.849,42.215 32.334,44.653 32.3,48.6 39.091,55.016 39.929,55.601 40.97,55.905 41.961,55.905 38.1,55.982 42.951,56.159 43.51,56.871 39.294,56.998 35.077,57.76 36.068,57.76 32.309,57.836 32.131,58.953 31.906,60.597 32.906,60.597 33.906,60.597 34.906,60.597 35.906,60.597 36.906,60.597 37.906,60.597 38.906,60.597 39.906,60.597 40.906,60.597
  other v2: 37.3,49.3 38.5,49.3 36.1,50.5 38.5,50.5 39.7,50.5 36.1,51.7 37.3,51.7 38.5,51.7 39.7,51.7 36.1,52.9 37.3,52.9 38.5,52.9 39.7,52.9
  other v3: 36.042,61.962
IN1_AC: BR1.2 J1.2 K1.11 | length 3.4
  Top Layer w0.7: BR1.2 38.964,30.607 39.597,29.974 39.597,28.503 J1.2
IN2_AC: BR1.1 J1.3 | length 2.6
  Top Layer w0.7: BR1.1@36.427,31.122 36.427,30.705 37.116,30.016 J1.3@37.116,28.826 ; J1.3@37.152,28.408 J1.3
Net1_1: 1.1 C17.1 L3.2 | length 2.4
  Top Layer w0.5: L3.2@42.9,59.223 C17.1 ; C17.1@42.9,60.523 42.9,61.7
NetC16_2: C16.2 L3.1 U2.30 | length 7.5
  Top Layer w0.2: U2.30 38.1,54.576 cw(c39.124,54.576) 38.4,55.3
  Top Layer w0.254: 38.4,55.3 39.1,56 cw(c40.549,54.551) 40.549,56.6 42.1,56.6 ccw(c42.1,57.4) 42.9,57.4 ; L3.1@43,58.125 L3.1@43,58.2
  Top Layer w0.5: 42.9,57.4 L3.1
NetIC1_1: IC1.1 R5.2 | length 1.2
  Top Layer w0.254: IC1.1 35.4,40.15 R5.2@35.696,40.446
NetK1_22: K1.22 R6.1 | length 3.6
  Top Layer w0.254: R6.1@32.131,46.263 32.131,46.069 33.504,44.696 33.504,43.536 K1.22
NetL1_2: L1.2 L2.1 | length 1.1
  Top Layer w0.2: L2.1@32.025,49.6 32.025,50.425 32.2,50.6 L1.2
NetL2_2: L2.2 U2.47 | length 1.7
  Top Layer w0.2: L2.2@33.375,49.6 33.475,49.5 33.475,49.456 33.631,49.3 U2.47
NetQ1_3: Q1.3 R4.2 | length 1.1
  Top Layer w0.254: R4.2 39.3,41.6 Q1.3
NetQ2_3: Q2.3 R7.2 | length 1.4
  Top Layer w0.2: Q2.3 36.95,42.088 36.957,42.081 36.957,41.885 37.262,41.58 37.313,41.58 R7.2@37.186,41.453
NetR1_1: R1.1 U1.2 | length 4.3
  Top Layer w0.5: R1.1 33.114,31.047 33.528,30.632 U1.2@33.528,28.067
NetR2_1: R2.1 R3.2 U1.3 | length 4.8
  Top Layer w0.2: U1.3 32.028,27.306 v1(32.156,27.178)
  Bottom Layer w0.2: v1(32.156,27.178) 32.461,27.178 32.944,26.695 R2.1 R3.2
OUT_AC: J1.1 K1.14
P0.02: U2.4
P0.03: U2.5
P0.04: U2.6
P0.05: U2.7
P0.06: U2.8
P0.07: U2.9
P0.08: U2.10
P0.09/NFC1: TP5.1 U2.11 | length 3
  Top Layer w0.2: U2.11 39.7,47.371 40.071,47 40.8,47 41.5,46.3 TP5.1@41.6,46.3
P0.10/NFC2: TP6.1 U2.12 | length 2
  Top Layer w0.2: U2.12 40.11,48.065 40.11,47.69 40.3,47.5 TP6.1@41.6,47.5
P0.11: U2.14
P0.12: U2.15
P0.13: U2.16
P0.14: U2.17
P0.15: U2.18
P0.16: R4.1 U2.19 | length 17.1
  Top Layer w0.2: v1(38.354,40.335) 39.035,40.335 R4.1 ; U2.19 41.41,51.3 41.859,50.851 v1(41.859,50.698)
  Bottom Layer w0.2: v1@38.329,40.488 38.71,40.488 39.218,40.996 42.52,40.996 43.129,41.605 43.129,49.428 v1(41.859,50.698)
P0.17: R7.1 U2.20 | length 19.9
  Top Layer w0.2: R7.1 37.324,40.481 37.324,40.045 v1(37.719,39.649) ; U2.20 41.67,51.7 41.986,51.384 42.723,51.384 v1(42.824,51.283)
  Bottom Layer w0.2: v1@37.668,39.7 37.723,39.645 38.629,39.645 39.548,40.564 42.748,40.564 43.536,41.351 43.536,50.571 v1(42.824,51.283)
P0.19: TP7.1 U2.22 | length 2.6
  Top Layer w0.2: U2.22 41.68,52.5 42.088,52.908 42.824,52.908 TP7.1@43.205,52.527
P0.20: TP8.1 U2.23 | length 2.6
  Top Layer w0.2: U2.23 41.445,52.9 42.22,53.675 TP8.1@43.175,53.675
P0.21: TP9.1 U2.24 | length 3
  Top Layer w0.2: U2.24 41.21,53.3 42.037,54.127 42.291,54.127 42.926,54.762 TP9.1@43.358,54.762
P0.22: U2.27
P0.23: U2.28
P0.24: U2.29
P0.25: C8.1 U2.37 | length 1.8
  Top Layer w0.2: C8.1 33.9,53.5 34.1,53.3 U2.37
P0.26: C9.1 U2.38 | length 1.8
  Top Layer w0.2: C9.1@33.2,52.6 33.8,52.6 34.1,52.9 U2.38
P0.27: U2.39
P0.28: U2.40
P0.29: U2.41
P0.30: U2.42
P0.31: U2.43
RELAY_OFF: K1.A2 Q2.1 Q2.2 Q2.5 Q2.6 Q2.7 | length 21.3
  Top Layer w0.3: v1(34.849,44.958) 34.849,44.901 34.925,44.825 34.953,44.853 35.055,44.955 35.41,44.6 Q2.6 ; Q2.6@35.65,44.775 Q2.6 ; Q2.5 36.3,43.88 Q2.7 ; Q2.6 35.65,43.923 Q2.7@35.973,43.6 ; Q2.7@35.973,43.6 Q2.7 ; Q2.7@35.973,43.6 35.65,43.277 Q2.1 Q2.2 36.3,43.32 Q2.7
  Bottom Layer w0.2: K1.A2 33.528,58.428 33.528,49.403 33.274,49.149 33.274,46.177 34.493,44.958 34.823,44.958 v1@34.976,45.11
RELAY_ON: K1.A1 Q1.1 Q1.2 Q1.5 Q1.6 Q1.7 | length 29.3
  Top Layer w0.2: Q1.7@37.998,43.279 37.998,42.6 37.998,41.986 v1(38.303,41.681) ; Q1.7@38.202,43.479 Q1.7@38.202,43.6 ; Q1.7@38.323,43.6 Q1.7
  Top Layer w0.254: Q1.1@37.998,42.6 Q1.1 ; Q1.7@37.998,43.279 38,43.277 Q1.1 ; Q1.6 38,43.923 38.323,43.6 Q1.7@38.202,43.479 ; Q1.5 38.65,43.88 Q1.7 38.65,43.32 Q1.2 Q1.1
  Top Layer w0.3: Q1.7@38.202,43.6 Q1.7@38.323,43.6
  Bottom Layer w0.2: v1@38.227,41.453 38.303,41.529 v1(38.303,41.681) 38.278,41.681 36.144,43.815 36.144,46.914 34.671,48.387 34.671,53.264 35.154,53.746 35.154,54.153 39.729,58.728 39.729,58.725 41.075,58.725 K1.A1
SWDCLK: TP4.1 U2.25 | length 2.2
  Top Layer w0.2: U2.25 41.298,54.125 TP4.1@41.973,54.8
SWDIO: TP3.1 U2.26 | length 1.8
  Top Layer w0.2: U2.26 39.7,54.7 39.9,54.9 TP3.1@40.843,54.9
VDD_HI: C1.2 IC1.4 IC1.6 K1.A3 R1.2 R2.2 | length 54.5
  Top Layer w0.254: IC1.6 32.004,39.604 31.709,39.899 31.709,41.301 31.858,41.45 IC1.4
  Top Layer w0.5: R1.2 32.004,39.604
  Bottom Layer w0.2: 31.369,59.487 31.775,59.893 36.271,59.893 ; 31.699,36.779 v1(32.004,36.474) v1@32.004,36.398 ; 31.953,28.804 31.394,28.245 31.394,26.746 32.004,26.137 R2.2 ; K1.A3 K1.A3@37.564,58.6
  Bottom Layer w0.4: 31.369,59.487 31.369,37.135 31.699,36.805 31.699,36.779 ; 36.271,59.893 K1.A3@37.564,58.6
  Bottom Layer w0.5: v1@32.004,36.398 v1(32.004,35.357) 32.004,34.304 v1(32,34.3) 31.75,34.05 31.75,29.007 31.953,28.804 32.715,28.042 C1.2 C1.2@33.706,28.042
VDD_MAINS: BR1.3 C2.2 U1.1 | length 11.9
  Top Layer w0.3: 35.052,31.801 35.077,31.826 35.077,32.004 35.839,32.766 35.839,32.893 35.941,32.995
  Top Layer w0.5: U1.1@35.052,29.688 35.052,31.801
  Top Layer w0.8: 35.941,32.995 35.941,33.641 38.87,36.57 ; BR1.3@38.87,37.619 38.87,36.57 ; C2.2@40.9,35.7 40.43,36.17 39.27,36.17 38.87,36.57
VDD_nRF: C3.1 C11.1 C13.1 C18.1 R5.1 R6.2 TP1.1 U2.13 U2.36 U2.48 | length 54.7
  Top Layer w0.2: C18.1 34.27,54.3 v1(34.366,54.204) 35.621,54.204 U2.36 ; R6.2@33.232,46.4 33.232,46.43 33.256,46.406 v1(34.112,46.406) ; v1(33.985,48.641) 34.141,48.641 34.4,48.9 U2.48 ; R5.1 R5.1@35.755,41.453 ; U2.13 41.5,48.9 ; TP1.1@43.256,45.364 43.256,45.441 43.256,45.593 TP1.1@43.282,45.618
  Top Layer w0.254: C13.1@42.748,46.515 42.85,46.414 42.85,46.076 43.256,45.669 TP1.1@43.256,45.593 ; TP1.1@43.231,45.618 TP1.1@43.256,45.593 ; TP1.1 TP1.1@43.256,45.593
  Top Layer w0.4: R5.1@35.755,41.453 36.449,41.453 36.449,39.853 v1(36.347,39.751) 36.449,39.751 37.305,38.895 38.108,38.895 38.989,39.776 39.903,39.776 C3.1@40.513,40.386 ; 41.5,48.9 41.7,49.1 41.7,49.396 42.342,50.038 43.561,50.038 43.713,49.886 43.713,45.898 TP1.1@43.256,45.441
  Top Layer w0.5: C3.1@40.6,40.9 41.432,41.732 41.458,41.707 41.508,41.758 41.554,41.712 v1(41.554,41.707)
  Bottom Layer w0.2: 41.859,46.558 41.872,46.545
  Bottom Layer w0.4: v1@34.061,46.533 34.061,52.222 34.087,52.248 34.087,53.924 v1(34.366,54.204) ; v1(34.112,46.406) 34.417,46.101 34.773,46.101 35.611,45.263 35.611,43.282 36.347,42.545 v1(36.347,39.751) 36.398,39.751 v1@36.449,39.7 ; 41.876,46.55 41.872,46.545 ; 41.872,46.545 42.621,45.796 42.621,42.469 41.859,41.707 v1(41.554,41.707) 40.64,41.707 39.599,42.748 39.599,44.272 41.872,46.545
  Bottom Layer w0.8: 41.876,46.55 v1(41.876,49.494)
XC1: C12.1 U2.34 X1.1 | length 3.4
  Top Layer w0.2: X1.1@34.625,56.775 34.625,56.663 35.7,55.588 35.7,55.511 36.5,54.711 U2.34
XC2: C6.1 U2.35 X1.3 | length 5.1
  Top Layer w0.2: C6.1@31.902,55.702 33.098,55.702 33.175,55.625 33.225,55.625 33.4,55.45 33.4,55.373 33.884,54.889 35.738,54.889 36.1,54.527 U2.35
XL1: C5.2 U2.2 Y1.2 | length 3
  Top Layer w0.2: U2.2 36.1,47.4 36.7,46.8 36.7,46.3 Y1.2@37.687,46.3
XL2: C7.2 U2.3 Y1.1 | length 4.4
  Top Layer w0.2: U2.3 36.5,47.6 36.8,47.3 38.1,47.3 38.513,46.887 38.513,46.3 C7.2
pads on no net: IC1.2 IC1.5 K1.12 U2.44

## Polygon pours and split planes (outlines as drawn)
GND on Bottom Layer "Bottom Layer-GND" (solid, remove dead copper, pour order 12): 31,61 43.9,61 43.9,39.9 39.3,39.9 32.1,32.7 31,32.7
OUT_AC on Bottom Layer "Bottom Layer-OUT_AC" (solid, pour order 42): 41.199,26.721 41.199,30.023 41.173,30.023 39.624,31.572 39.624,34.62 43.815,34.62 43.815,26.721
IN1_AC on Bottom Layer "Bottom Layer-IN1_AC" (solid, pour order 32): 40.692,26.708 40.692,29.808 39.243,31.257 39.243,35.008 43.792,35.008 43.792,39.308 43.767,39.333 43.742,39.308 39.642,39.308 35.217,34.883 35.217,32.483 37.892,29.808 38.567,29.133 38.567,26.733 38.592,26.708
GND on Top Layer "Top Layer-GND" (solid, remove dead copper, pour order 0): 31,61 43.9,61 43.9,39.947 39.347,39.947 32.1,32.7 31,32.7
OUT_AC on Top Layer "Top Layer-OUT_AC" (solid, pour order 22): 41.199,26.721 41.199,30.023 41.173,30.023 38.76,32.436 38.76,34.62 43.815,34.62 43.815,26.721

## Keep-outs
Keep-Out Layer:
  rectangle: 30.81,61.341 44.145,68.834
  lines w0.254: 42.072,43.282 cw(c41.199,43.332) 42.074,43.332

## Other copper
Top Layer:
  region net Net1_1: 42.621,60.147 42.9,59.868 42.9,59.867 43.18,60.147 43.18,60.63 42.621,60.63

## Silkscreen, mask and mechanical layers (free items; w line width, h text height)
Top Solder:
  rectangle: 30.81,61.011 44.221,68.859
Bottom Solder:
  rectangle: 30.836,61.036 44.247,68.885
Route Tool Path:
  lines w2: 26.642,51.056 29.836,54.25 29.836,68.6 ; 26.811,46.775 29.912,43.674 29.912,25 ; 34.214,24 30.912,24 ; 40.818,24 44.12,24 ; 48.218,46.804 45.12,43.706 45.12,25 ; 48.297,51.117 45.12,54.294 45.12,68.6 ; 29.836,68.6 cw(c30.836,68.6) 30.836,69.6 ; 29.836,68.6 cw(c30.836,68.6) 30.836,69.6 ; 29.912,25 ccw(c30.912,25) 30.912,24 ; 29.912,25 ccw(c30.912,25) 30.912,24 ; 30.836,69.6 44.12,69.6 ; 44.12,24 ccw(c44.12,25) 45.12,25 ; 44.12,24 ccw(c44.12,25) 45.12,25 ; 44.12,69.6 cw(c44.12,68.6) 45.12,68.6 ; 44.12,69.6 cw(c44.12,68.6) 45.12,68.6